# Altium PCB PCBchung.PcbDoc
Units mm, origin at the board's own origin, x right, y up, seen from the top; angles counter-clockwise.
Board outline 151.24 x 101 mm, 2 copper layers (Top Layer, Bottom Layer); 28 components, 21 nets, 66 pads, 0 vias.
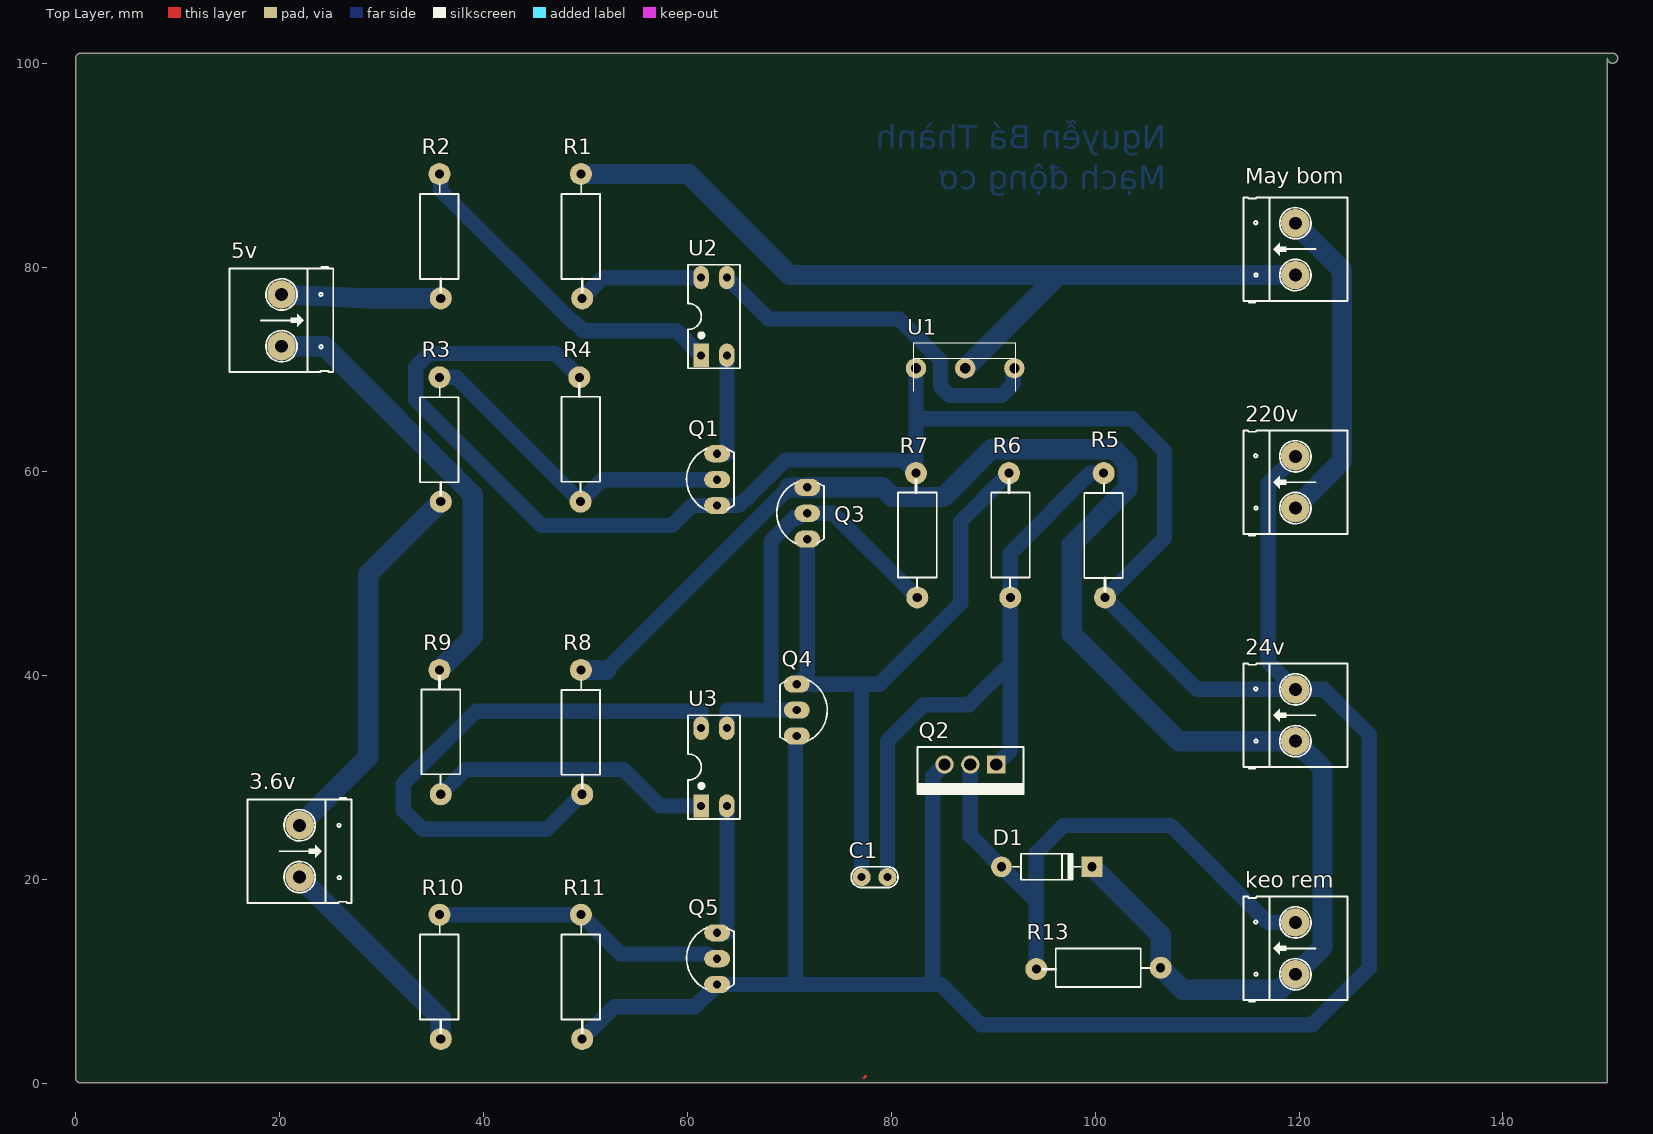
[diagram p0: Top Layer view]
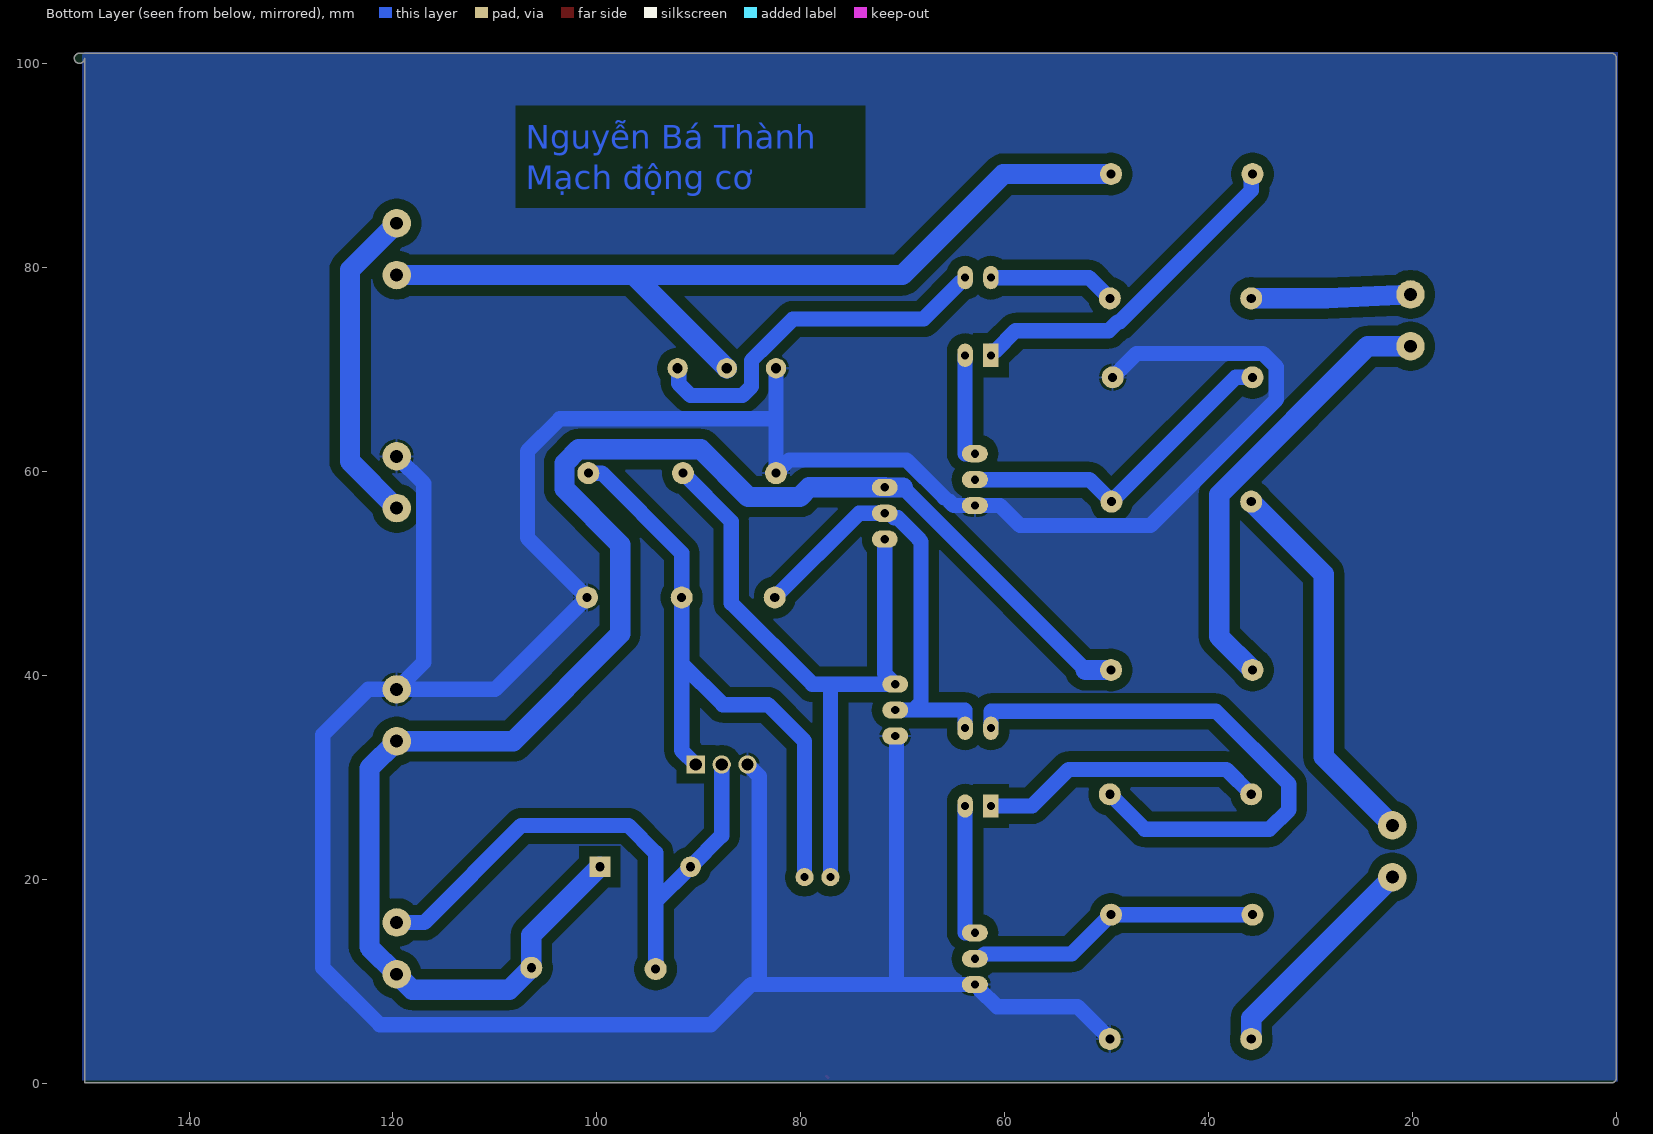
[diagram p1: Bottom Layer view, seen from below]
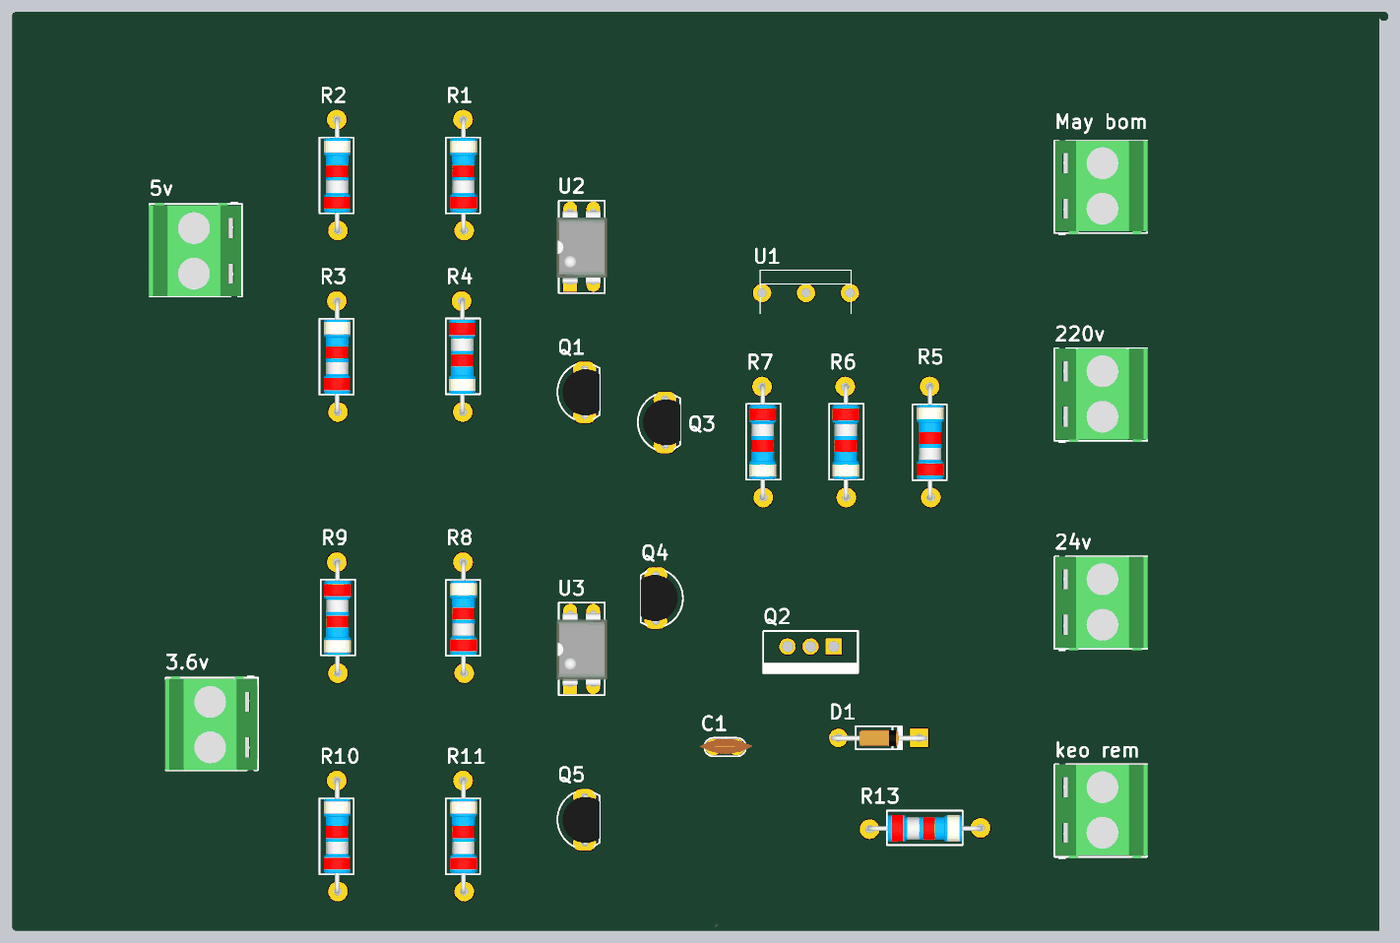
[diagram p2: 3D render of the assembled board from above, using the file's embedded part models]

## Layer stack, top to bottom
Top Solder: solder mask 0.0102, Solder Resist, Dk 3.5
Top Layer: signal copper 0.0356
Dielectric 1: dielectric 0.32, FR-4, Dk 4.8
Bottom Layer: signal copper 0.0356
Bottom Solder: solder mask 0.0102, Solder Resist, Dk 3.5

## Board outline
0.008,0.508 ccw(c0.508,0.508) 0.508,0.008 150.249,0.008 150.249,100.508 ccw(c150.749,100.508) 150.628,100.994 ccw(c150.51,100.525) 150.508,101.008 0.508,101.008 ccw(c0.508,100.508) 0.008,100.508

## Design rules (kind name [scope] priority, off if disabled: settings)
Clearance [All] p1: gap=1 ignorepadtopadclearanceinfootprint=FALSE
PolygonConnect [All] p1: connectstyle=Relief reliefconductorwidth=0.254 reliefentries=4 polygonreliefangle="90 Angle" airgapwidth=0.254
RoutingLayers [All] p1: top layer_v5=FALSE bottom layer_v5=TRUE
RoutingVias [All] p1: holewidth=0.711 width=1.27 viastyle="Through Hole" minholewidth=0.711 minwidth=1.27 maxholewidth=0.711 maxwidth=1.27
SolderMaskExpansion [All] p1: expansion=0.102 istentingtop=FALSE
Width [All] p1: maxlimit=2 minlimit=0.254 preferedwidth=1.5
29 further rules are at their usual default settings.

## Components (designator, comment, footprint, x,y, rotation, side; value= is the part's Value field where it differs from the comment)
3.6v "3.6V" HED2 21.971,25.273 r270 top value="Header 2"
5v "5V" HED2 20.193,77.343 r270 top value="Header 2"
24v "24V" HED2 119.634,33.528 r90 top value="Header 2"
220v "220V" HED2 119.634,56.388 r90 top value="Header 2"
C1 "100pF" CN1 77.089,20.193 r0 top
D1 "1N4007" D1A 90.805,21.209 r180 top
"keo rem" "Keo Rem" HED2 119.634,10.668 r90 top value="Header 2"
"May bom" "" HED2 119.634,79.248 r90 top value="Header 2"
Q1 "BC547" QTO-92 62.916,59.182 r90 top value=C9014
Q2 "IRF640" TO220AB 87.757,31.242 r180 top
Q3 "BC547" QTO-92 71.755,55.88 r90 top value=C9014
Q4 "BC557" QTO-92 70.739,36.576 r270 top value=C9015
Q5 "BC547" QTO-92 62.916,12.192 r90 top value=C9014
R1 "180" RES-1/2W 49.56,82.55 r90 top
R2 "180" RES-1/2W 35.687,82.55 r90 top
R3 "180" RES-1/2W 35.687,62.611 r90 top
R4 "180" RES-1/2W 49.53,63.627 r270 top
R5 "180" RES-1/2W 100.838,53.213 r90 top
R6 "180" RES-1/2W 91.679,54.229 r270 top
R7 "180" RES-1/2W 82.55,54.229 r270 top
R8 "180" RES-1/2W 49.56,33.909 r90 top
R9 "180" RES-1/2W 35.814,34.925 r270 top
R10 "180" RES-1/2W 35.687,9.906 r90 top
R11 "180" RES-1/2W 49.56,9.906 r90 top
R13 "180" RES-1/2W 99.822,11.303 r0 top
U1 "BTA20" TO-220MAX 84.709,70.104 r270 top
U2 "PC817" DIP4 61.341,71.374 r0 top
U3 "PC817" DIP4 61.341,27.178 r0 top

## Footprints (in the part's own frame and the unit in brackets; to place one, negate y for a bottom-side part, rotate by r counter-clockwise, add the part's x,y. Pads: shape width x height; smd on the part's side, far side on the other; paste and mask are expansions set on the pad)
CN1 [mil]
  round 70 hole 31: 1(0,0) 2(100,0)
  silkscreen extent -40,-40 141,40, body extent -60,-30 170,37, height 265
D1A [mil] "Diode 1A, W 100mil, L 350mil"
  round 80 hole 35: 1(0,0)
  rect 80x80 hole 35: 2(-350,0)
  silkscreen extent -305,-50 -45,50, body extent -386,-33 34,36, height 84
DIP4 [mil]
  rect 60x90 hole 31: 1(0,0)
  oval 60x90 hole 31: 2(100,0) 3(100,300) 4(0,300)
  silkscreen extent -50,-50 150,350, body extent -59,-10 159,305, height 170
HED2 [mil] "Header 2, 2 pin, hight 300mil, Pin to Pin 200, Colour Green"
  round 110 hole 50: 1(0,0) 2(200,0)
  silkscreen extent -106,-201 300,200, body extent -106,-205 300,197, height 560
QTO-92 [mil] "TO-92"
  oval 66x100 hole 32: 1(-100,0) 2(0,0) 3(100,0)
  silkscreen extent -117,-65 120,118, body extent -109,-66 109,95, height 245
RES-1/2W [mil]
  round 85 hole 35: 1(-220,-5) 2(260,0)
  silkscreen extent -195,-74 221,75, body extent -230,-60 270,56, height 121
TO220AB [mm] "TO, Thru-Hole, Vertical, Heatsink Mounted; 3 In-Line Leads; Pitch 2.54 mm; Pin sequence 1, 3, 2"
  rect 1.8x1.8 hole 1.2: 1(-2.54,0)
  round 1.8 hole 1.2: 2(0,0) 3(2.54,0)
  silkscreen extent -5.2,-1.7 5.2,2.9
TO-220MAX [mm]
  round 2 hole 1: 1(0,-2.286) 2(0,2.54) 3(0,7.366)
  silkscreen extent -2.5,-2.5 2.25,7.5, body extent -2.4,-2.45 2.1,7.45, height 19.7

## Part data
3.6v 5v 24v 220v "keo rem" "May bom": library part Hed2, "Header 2 (Green)"
C1: library part CN1, "Cap np  1pF - 472pF"
D1: library part D1A, "Diode 1A"
Q1 Q3 Q5: library part NPN_EBC, "P 600mW, EBC"
Q4: library part PNP_EBC, "P 600mW, EBC"
R1 R2 R3 R4 R5 R6 R7 R8 R9 R10 R11 R13: library part Res, "Res", Manufacturer="Generic Components", Class=Passive, Published=08/06/2000, Publisher="Altium Hobart Technology Centre", SubClass=R
U1: "Triacs - 20A"
U2 U3: "Single Opto"

## Nets (pads, with @x,y where several pads share a name; then routed paths per layer and width w, separated by ;. In a path a pad name is that pad's centre, name@x,y a point inside that pad or via, vN(x,y) a via of type N, cw(c..) or ccw(c..) an arc to the next point about the centre after c; other vN are vias at no path point)
GND: 24v.2 220v.2 Q1.1 Q2.3 Q4.3 Q5.1 R4.1 R5.1 R7.1 R11.1 U1.1 | length 339.8
  Bottom Layer w1.5: R4.1 47.066,71.552 34.671,71.552 33.35,70.231 33.35,67.031 45.695,54.686 58.496,54.686 60.452,56.642 Q1.1 64.999,56.642 65.436,57.08 ; R11.1 52.862,7.493 60.757,7.493 62.451,9.186 62.451,9.571 62.532,9.652 Q5.1 70.612,9.652 ; 65.913,57.404 69.621,61.112 81.128,61.112 R7.1 82.423,65.151 ; Q4.3 70.693,34.036 70.612,33.955 70.612,9.652 ; U1.1 82.423,65.151 ; Q2.3 84.074,30.099 84.074,9.652 ; 220v.2 116.967,58.801 116.967,41.275 24v.2 ; 70.612,9.652 84.074,9.652 ; 82.423,65.151 103.632,65.151 106.807,61.976 106.807,53.467 R5.1 109.982,38.608 24v.2 ; 84.074,9.652 84.887,9.652 88.824,5.715 121.285,5.715 126.873,11.303 126.873,34.163 122.428,38.608 24v.2
Net3.6v_1: 3.6v.1 R3.1 | length 37.5
  Bottom Layer w2: 3.6v.1 28.702,32.004 28.702,49.911 R3.1
Net3.6v_2: 3.6v.2 R10.1 | length 21.6
  Bottom Layer w2: 3.6v.2 35.814,6.35 R10.1
Net5v_1: 5v.1 R2.1 | length 15.6
  Bottom Layer w2: 5v.1 28.397,76.962 R2.1
Net5v_2: 5v.2 R9.1 | length 43.4
  Bottom Layer w2: 5v.2 24.409,72.263 38.964,57.709 38.964,43.79 R9.1
Net24v_1: 24v.1 "keo rem.1" D1.2 Q3.3 R8.2 R13.2 | length 161.7
  Bottom Layer w1.5: 52.07,40.513 67.437,55.88 69.966,58.409
  Bottom Layer w2: R8.2 52.07,40.513 ; 69.966,58.409 71.744,58.409 Q3.3 79.146,58.42 80.086,57.48 85.141,57.48 89.807,62.147 101.803,62.147 103.168,60.782 103.168,58.293 97.688,52.814 97.688,44.044 108.204,33.528 24v.1 122.301,30.861 122.301,13.335 119.634,10.668 118.11,9.144 108.585,9.144 R13.2 106.426,14.478 D1.2
Net220v_1: 220v.1 "May bom.2" | length 31.7
  Bottom Layer w2: 220v.1 124.206,60.96 124.206,79.756 119.634,84.328
NetC1_1: C1.1 Q3.1 Q4.1 R6.1 | length 67.7
  Bottom Layer w1.5: Q3.1 71.755,40.132 Q4.1 77.089,39.116 ; C1.1 77.089,39.116 ; R6.1 86.817,55.082 86.817,47.066 78.867,39.116 77.089,39.116
NetC1_2: C1.2 Q2.1 R5.2 R6.2 | length 62.3
  Bottom Layer w1.5: C1.2 79.629,33.528 83.21,37.109 87.64,37.109 91.679,41.148 ; Q2.1 91.679,32.624 91.679,41.148 ; R5.2 99.508,59.817 91.679,51.988 R6.2 91.679,41.148
NetD1_1: "keo rem.2" D1.1 Q2.2 R13.1 | length 58
  Bottom Layer w1.5: Q2.2 87.757,24.257 D1.1 94.234,17.78 ; R13.1 94.234,17.78 ; 119.634,15.748 116.916,15.748 107.417,25.248 96.901,25.248 94.234,22.581 94.234,17.78
"NetMay bom_1": "May bom.1" R1.2 U1.2 | length 87.1
  Bottom Layer w2: R1.2 60.122,89.154 70.028,79.248 96.393,79.248 ; U1.2 96.393,79.248 ; 119.634,79.248 96.393,79.248
NetQ1_2: Q1.2 R3.2 R4.2 | length 33.2
  Bottom Layer w1.5: R3.2 37.338,69.215 R4.2 51.689,59.182 Q1.2
NetQ1_3: Q1.3 U2.2 | length 10.6
  Bottom Layer w1.5: Q1.3 63.881,61.722 U2.2
NetQ3_2: Q3.2 Q4.2 R7.2 U3.3 | length 44.4
  Bottom Layer w1.5: U3.3 63.881,36.576 68.961,36.576 ; Q4.2 68.961,36.576 ; R7.2 74.295,55.88 71.275,55.88 70.824,55.428 70.458,55.428 68.437,53.407 68.437,53.338 68.199,53.099 68.199,37.338 68.961,36.576
NetQ5_2: Q5.2 R10.2 R11.2 | length 29
  Bottom Layer w1.5: R10.2 R11.2 53.426,12.644 61.985,12.644 62.437,12.192 Q5.2
NetQ5_3: Q5.3 U3.2 | length 13.4
  Bottom Layer w1.5: Q5.3 63.881,14.732 U3.2
NetR1_1: R1.1 U2.4 | length 12.5
  Bottom Layer w1.5: R1.1 51.719,78.994 U2.4
NetR2_2: R2.2 U2.1 | length 34.1
  Bottom Layer w1.5: R2.2 35.813,89.028 35.813,87.542 48.722,74.632 48.939,74.632 49.784,73.787 58.928,73.787 60.948,71.767 61.329,71.767 61.341,71.755 U2.1
NetR8_1: R8.1 U3.4 | length 56.1
  Bottom Layer w1.5: R8.1 46.258,24.892 34.036,24.892 32.131,26.797 32.131,29.312 39.294,36.474 61.341,36.474 U3.4
NetR9_2: R9.2 U3.1 | length 28
  Bottom Layer w1.5: R9.2 38.252,30.759 53.721,30.759 57.302,27.178 U3.1
NetU1_3: U1.3 U2.3 | length 36.6
  Bottom Layer w1.5: U2.3 63.881,78.619 63.892,78.608 64.267,78.608 67.945,74.93 80.772,74.93 83.348,72.354 83.355,72.354 84.673,71.036 84.673,71.029 84.836,70.866 84.836,68.316 85.715,67.437 90.805,67.437 91.979,68.611 91.979,70.008 U1.3
copper on no net: | length 0.2
  Top Layer w0.254: 77.321,0.508 77.47,0.657

## Polygon pours and split planes (outlines as drawn)
GND on Bottom Layer "GND_L02_P000" (solid, pour order 0): -0.127,101.092 150.241,101.092 150.495,100.838 150.495,0.254 0.127,0.254 -0.127,0

## Other copper
Bottom Layer:
  text "Nguyễn Bá Thành / Mạch động cơ" at 106.961,86.868 h4